# Altium PCB for_BLDC_fan.PcbDoc
Units mm, origin at the board's own origin, x right, y up, seen from the top; angles counter-clockwise.
Board outline 166.45 x 52.15 mm, 2 copper layers (Top Layer, Bottom Layer); 25 components, 37 nets, 115 pads, 23 vias.
Unrouted connection lines stored in the file: 1.
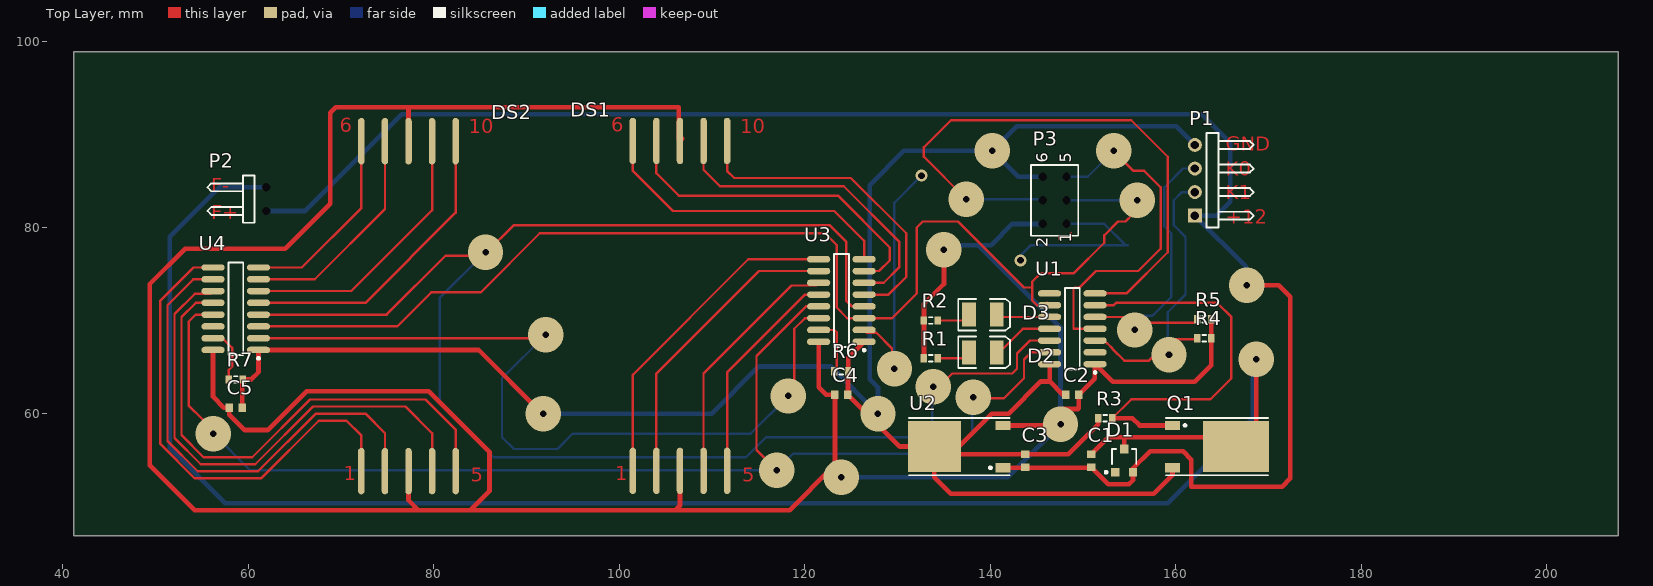
[diagram p0: Top Layer view]
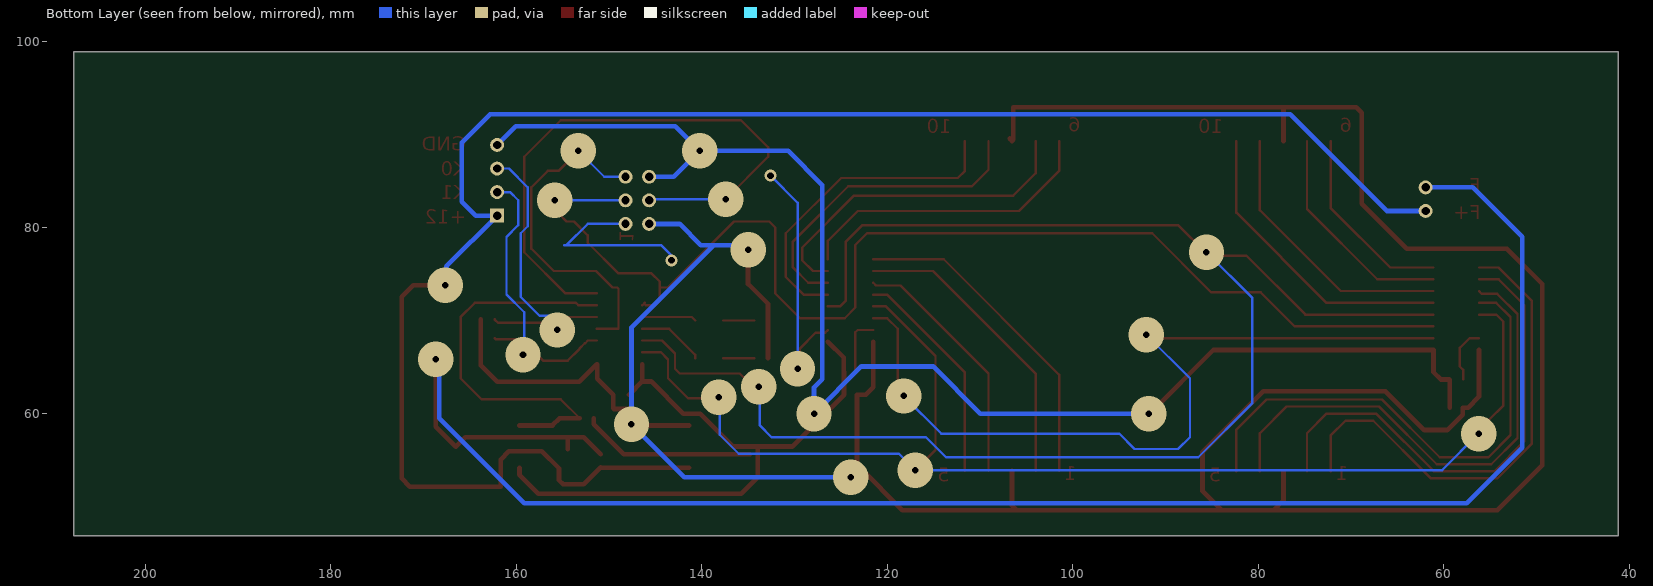
[diagram p1: Bottom Layer view, seen from below]

## Layer stack, top to bottom
Top Layer: signal copper 0.0356
Dielectric: dielectric 0.32, FR-4, Dk 4.8
Bottom Layer: signal copper 0.0356

## Board outline
41.224,98.933 41.224,46.787 207.67,46.787 207.67,98.933

## Design rules (kind name [scope] priority, off if disabled: settings)
Clearance [All] p1: gap=0.508
PolygonConnect [All] p1: connectstyle=Relief reliefconductorwidth=0.254 reliefentries=4 polygonreliefangle="90 Angle"
RoomDefinition "U_Индикатор с драйвером1" [InComponentClass('U_Индикатор с драйвером1')] p1: confinementstyle=ConfineIn formatcopy=TRUE lockcomponents=FALSE outline 91.821,46.787 137.287,46.787 137.287,97.663 91.821,97.663
RoomDefinition for_BLDC_fan [InComponentClass('for_BLDC_fan')] p2: confinementstyle=ConfineIn formatcopy=TRUE lockcomponents=FALSE outline 41.224,46.787 207.67,46.787 207.67,98.933 41.224,98.933
RoomDefinition "U_Индикатор с драйвером2" [InComponentClass('U_Индикатор с драйвером2')] p3: confinementstyle=ConfineIn formatcopy=TRUE lockcomponents=FALSE outline 41.224,46.787 91.821,46.787 91.821,97.993 41.224,97.993
RoutingVias [All] p1: holewidth=0.711 width=3.81 viastyle="Through Hole" minholewidth=0.711 minwidth=0.508 maxholewidth=0.711 maxwidth=5.08
SilkscreenOverComponentPads [All] p1 off: minsilkscreentomaskgap=0.2
SolderMaskExpansion [All] p1: expansion=0.102
Width [(InNet('5В') OR InNet('GND') OR InNet('12B') OR InNet('NetC1_1'))] p1: maxlimit=1.016 minlimit=0.508 preferedwidth=0.762
Width Width_1 [All] p2: maxlimit=0.508 minlimit=0.254 preferedwidth=0.254
27 further rules are at their usual default settings.

## Classes and differential pairs
component class "U_Индикатор с драйвером2": C5 DS2 R7 U4
component class "U_Индикатор с драйвером1": C4 DS1 R6 U3
channel class "Индикатор с драйвером": "U_Индикатор с драйвером1" "U_Индикатор с драйвером2"
component class for_BLDC_fan: C1 C2 C3 D1 D2 D3 J11 P1 P2 P3 P?1 Q1 R1 R2 R3 R4 R5 U1 U2

## Components (designator, comment, footprint, x,y, rotation, side; value= is the part's Value field where it differs from the comment)
C1 "Cap Semi" CAPC1608L 150.876,54.864 r270 top
C2 "Cap Semi" CAPC1608L 148.844,61.976 r0 top
C3 "Cap Semi" CAPC1608L 143.764,54.864 r270 top
C4 "Cap Semi" CAPC1608L 123.952,61.976 r180 top
C5 "Cap Semi" CAPC1608L 58.674,60.579 r180 top (schematic designator C4)
D1 "BAV99" SOT-23 154.432,54.864 r0 top (schematic designator D2)
D2 "LED3" DSO-C2/D5.6 139.192,66.548 r0 top (schematic designator D1)
D3 "LED3" DSO-C2/D5.6 139.192,70.612 r0 top
DS1 "SA10" SA10-21_SMD 118.618,89.332 r270 top
DS2 "SA10" SA10-21_SMD 89.357,89.306 r270 top (schematic designator DS1)
P1 "Header 4H" HDR1X4H 162.052,81.28 r90 top
P2 "Header 2H" HDR1X2H 61.976,84.328 r270 top
P3 "Header 3X2" HDR2X3 148.209,80.391 r90 top
Q1 "IRFR024" TO-252AA 163.068,56.388 r270 top
R1 "Res3" RESC1608L 133.604,65.913 r0 top
R2 "Res3" RESC1608L 133.604,69.977 r0 top
R3 "Res3" RESC1608L 152.4,59.436 r0 top
R4 "Res3" RESC1608L 163.068,68.072 r0 top
R5 "Res3" RESC1608L 163.068,70.104 r0 top
R6 "Res3" RESC1608L 123.952,64.516 r180 top
R7 "Res3" RESC1608L 58.674,63.627 r180 top (schematic designator R6)
U1 "ATtiny24" SOIC14_M 148.844,69.088 r180 top
U2 "MC78M05BDTRK" 369A-13 137.668,56.388 r90 top
U3 "MBI5168" SO-16_M 123.952,72.136 r180 top
U4 "MBI5168" SO-16_M 58.674,71.247 r180 top (schematic designator U3)

## Footprints (in the part's own frame and the unit in brackets; to place one, negate y for a bottom-side part, rotate by r counter-clockwise, add the part's x,y. Pads: shape width x height; smd on the part's side, far side on the other; paste and mask are expansions set on the pad)
369A-13 [mm] "D-PAK/TO-252-AA; 3 Leads (1 Cropped); Body 10.3 (inc. leads) x 6.7 mm (LxW max)"
  rect 1x1.6 smd: 1(-2.285,-3.7) 3(2.285,-3.7)
  rect 5.5x5.7 smd: 4(0,3.7)
  silkscreen extent -3.09,-4.4 3.09,6.45
CAPC1608L [mm] "Chip Capacitor, Body 1.6x0.8mm, IPC High Density"
  rect 0.8x0.9 smd: 1(-0.7,0) 2(0.7,0)
  body extent -0.87,-0.48 0.87,0.48, height 1.3
DSO-C2/D5.6 [mm] "SM LED; 2 C-Bend Leads; Body 3.5 x 2.8 x 1.9 mm, inc leads (LxWxH typ)"
  rect 1.5x2.6 smd: 1(-1.5,0) 2(1.5,0)
  silkscreen extent -2.65,-1.7 2.95,1.7
HDR1X2H [mm] "Connector; Header; 2 Position; Right Angle"
  round 0 / inner round 0 / far side round 1.5 hole 0.9: 1(0,0) 2(2.54,0)
  silkscreen extent -1.27,-6.35 3.81,-1.27
HDR1X4H [mm] "Connector; Header; 4 Position; Right Angle"
  rect 1.5x1.5 hole 0.9: 1(0,0)
  round 1.5 hole 0.9: 2(2.54,0) 3(5.08,0) 4(7.62,0)
  silkscreen extent -1.27,-6.35 8.89,-1.27
HDR2X3 [mm] "Connector; Header; 3x2 Position"
  round 0 / inner round 0 / far side round 1.5 hole 0.9: 1(0,0) 2(0,2.54) 3(2.54,0) 4(2.54,2.54) 5(5.08,0) 6(5.08,2.54)
  silkscreen extent -1.27,-1.27 6.35,3.81
RESC1608L [mm] "Chip Resistor, Body 1.6x0.8mm, IPC High Density"
  rect 0.7x0.9 smd: 1(-0.75,0) 2(0.75,0)
  silkscreen extent -0.2,-0.35 0.2,0.35, body extent -0.85,-0.48 0.85,0.48, height 0.9
SA10-21_SMD [mm] "для SA10-21GWA с отогнутыми ножками"
  oval 5x0.7 smd: 1(35.56,-17.145) 2(35.56,-14.605) 3(35.56,-12.065) 4(35.56,-9.525) 5(35.56,-6.985) 6(0,-17.145) 7(0,-14.605) 8(0,-12.065) 9(0,-9.525) 10(0,-6.985)
  body extent 0,-24 34,0, height 11
SO-16_M [mm] "16-Pin Small Outline Integrated Circuit 1.27 mm Pitch, IPC Low Density"
  oval 2.5x0.7 smd: 1(-2.45,4.445) 2(-2.45,3.175) 3(-2.45,1.905) 4(-2.45,0.635) 5(-2.45,-0.635) 6(-2.45,-1.905) 7(-2.45,-3.175) 8(-2.45,-4.445) 9(2.45,-4.445) 10(2.45,-3.175) 11(2.45,-1.905) 12(2.45,-0.635) 13(2.45,0.635) 14(2.45,1.905) 15(2.45,3.175) 16(2.45,4.445)
  silkscreen extent -2.58,-5 0.8,5.47, body extent -2,-5 2,5, height 1.75
SOIC14_M [mm] "14-Pin Small Outline Integrated Circuit 1.27 mm Pitch, IPC Low Density"
  oval 2.5x0.7 smd: 1(-2.45,3.81) 2(-2.45,2.54) 3(-2.45,1.27) 4(-2.45,0) 5(-2.45,-1.27) 6(-2.45,-2.54) 7(-2.45,-3.81) 8(2.45,-3.81) 9(2.45,-2.54) 10(2.45,-1.27) 11(2.45,0) 12(2.45,1.27) 13(2.45,2.54) 14(2.45,3.81)
  silkscreen extent -2.58,-4.4 0.8,4.83, body extent -2,-4.38 2,4.38, height 1.75
SOT-23 [mm] "SOT-23; 3 Leads; Body 3.0 x 2.6 mm, inc. leads (LxW max)"
  rect 0.9x0.95 smd: 1(-0.95,-1.25) 2(0.95,-1.25) 3(0,1.25)
  silkscreen extent -2.07,-1.37 1.3,1.25
TO-252AA [mm] "D-PAK/TO-252-AA; 3 Leads (1 Cropped); Body 10.4 (inc. leads) x 6.7 mm (LxW max)"
  rect 1x1.6 smd: 1(-2.285,-3.425) 3(2.285,-3.425)
  rect 5.5x7.1 smd: 4(0,3.425)
  silkscreen extent -3.09,-4.13 3.09,6.88

## Part data
C1 C2 C3 C4 C5: "Capacitor (Semiconductor SIM Model)"
D1: "Silicon Switching Diode Array for High-Speed Switching"
D2 D3: "Typical BLUE SiC LED"
DS1 DS2: library part SA10-21GWA, "KingBright, SA10-21GWA"
P1: "Header, 4-Pin, Right Angle"
P2: "Header, 2-Pin, Right Angle"
P3: "Header, 3-Pin, Dual row"
Q1: "HEXFET N-Channel Power MOSFET"
R1 R2 R3 R4 R5 R6 R7: "Resistor"
U1: "8-Bit AVR Microcontroller with 1K Byte of Flash Memory"
U2: "Three-Terminal Medium Current Positive Voltage Regulator"
U3 U4: "Macroblock, 8-bit Constant Current LED Sink Driver"

## Via types
v1: diameter 3.81, hole 0.711, Top Layer to Bottom Layer, 21 vias
v2: diameter 1.27, hole 0.711, Top Layer to Bottom Layer, 2 vias

## Nets (pads, with @x,y where several pads share a name; then routed paths per layer and width w, separated by ;. In a path a pad name is that pad's centre, name@x,y a point inside that pad or via, vN(x,y) a via of type N, cw(c..) or ccw(c..) an arc to the next point about the centre after c; other vN are vias at no path point)
5В: C2.2 C4.2 C5.2 DS1.3 DS1.8 DS2.3 DS2.8 P3.2 R1.1 R2.1 R4.2 R5.2 U1.1 U2.3 U3.16 U4.16 | length 356.1
  Top Layer w0.508: U4.16 56.224,61.759 57.404,60.579 C5.2 57.974,59.844 59.652,58.166 62.116,58.166 66.307,62.357 79.489,62.357 86.014,55.832 86.014,51.597 83.947,49.53 ; DS2.3 77.292,50.597 78.359,49.53 ; DS2.8 77.292,92.913 ; DS1.3 106.553,50.038 106.045,49.53 ; DS1.8@106.807,89.586 DS1.8 106.426,89.459 106.426,92.964 69.456,92.964 68.866,92.375 68.866,82.582 64.008,77.724 53.213,77.724 49.403,73.914 49.403,54.356 54.229,49.53 78.359,49.53 ; U3.16 121.502,62.775 122.301,61.976 C4.2 123.252,54.418 122.936,54.102 118.364,49.53 106.045,49.53 ; R1.1 R2.1 132.854,71.767 135.001,73.914 v1(135.001,77.597) ; v1@134.239,77.089 134.874,77.724 v1@135.255,78.105 ; U2.3 145.795,58.673 146.749,59.627 147.574,60.452 149.479,60.452 149.544,60.517 C2.2 151.257,63.689 151.257,65.241 U1.1 153.199,63.373 162.052,63.373 163.818,65.139 R4.2 R5.2 ; 78.359,49.53 83.947,49.53 ; 83.947,49.53 106.045,49.53
  Bottom Layer w0.508: v1(123.952,53.086) 141.859,53.086 v1(147.574,58.801) 147.574,69.215 138.684,78.105 ; v1(135.001,77.597) 135.001,77.851 135.255,78.105 138.684,78.105 ; P3.2 142.367,80.391 140.081,78.105 138.684,78.105
12B: C1.2 C3.2 D1.2 P1.1 P2.2 U2.1 | length 192.8
  Top Layer w0.508: U2.1 143.764,54.103 150.815,54.103 C1.2 ; C1.2@151.126,53.914 C1.2 ; v1(167.64,73.787) 171.069,73.787 172.339,72.517 172.339,52.959 171.45,52.07 161.671,52.07 161.671,54.991 160.782,55.88 157.226,55.88 155.382,54.036 D1.2 155.382,52.766 154.94,52.324 152.716,52.324 C1.2
  Bottom Layer w0.508: P2.2 66.167,81.788 76.581,92.202 162.814,92.202 165.862,89.154 165.862,82.804 164.338,81.28 P1.1 167.513,75.819 v1@167.513,73.787
GND: C2.1 C3.1 C4.1 C5.1 P1.4 P3.6 Q1.3 R3.1 R6.1 R7.1 U1.14 U2.4 U3.1 U4.1 | length 238.8
  Top Layer w0.508: C5.1 59.374,63.577 R7.1 60.325,63.627 61.124,64.426 U4.1 84.836,66.802 v1@91.757,59.88 ; R6.1@124.652,64.466 C4.1 127.286,59.341 130.24,56.388 U2.4 ; R6.1 124.702,65.991 U3.1 ; U2.4@134.792,55.564 C3.1 148.401,55.564 151.65,58.813 R3.1 ; U1.14 146.394,63.41 ; C2.1@147.828,61.976 146.394,63.41 ; Q1.3 159.643,53.344 157.607,51.308 135.763,51.308 133.968,53.103 U2.4 ; U2.4 136.614,56.388 140.161,59.935 141.977,59.935 145.452,63.41 146.394,63.41
  Bottom Layer w0.508: v1(91.821,59.944) 109.982,59.944 115.062,65.024 122.809,65.024 v1(127.889,59.944) 127.889,62.776 127,63.665 127,84.582 130.683,88.265 v1(140.208,88.265) ; P3.6 143.002,85.471 v1(140.208,88.265) ; P1.4 160.02,90.932 142.875,90.932 v1(140.208,88.265)
KEY0: P1.3 R5.1 U1.5 | length 35
  Top Layer w0.254: U1.5 v1@155.575,70.358 ; v1@155.575,68.834 v1(155.575,68.961) v1@155.575,70.358 ; v1@155.575,70.485 v1@155.575,70.358 ; v1@156.222,70.104 155.968,70.358 v1@155.575,70.358 ; v1@156.845,69.723 161.937,69.723 R5.1
  Bottom Layer w0.254: v1@155.575,68.834 v1(155.575,68.961) 155.575,70.485 157.48,70.485 159.512,72.517 159.512,79.375 158.75,80.137 158.75,84.328 160.782,86.36 P1.3
KEY1: P1.2 R4.1 U1.3 | length 35.2
  Top Layer w0.254: U1.3 152.273,67.818 152.558,67.533 152.602,67.533 153.179,66.956 153.179,66.912 154.432,65.659 157.099,65.659 158.496,67.056 159.258,67.818 v1(159.258,66.294) ; v1@159.131,67.945 159.258,67.945 162.191,67.945 R4.1
  Bottom Layer w0.254: v1(159.258,66.294) 159.258,67.818 159.131,67.945 159.131,70.866 161.036,72.771 161.036,78.994 159.766,80.264 159.766,82.931 160.655,83.82 P1.2
LE: U1.12 U3.4 U4.4 | length 174.3
  Top Layer w0.254: U4.4 74.93,70.612 81.28,76.962 85.344,76.962 85.661,77.279 88.646,80.264 122.682,80.264 124.46,78.486 124.46,72.136 125.095,71.501 U3.4 ; v1(133.858,62.854) 133.858,62.992 133.477,62.992 133.477,62.854 133.477,62.357 133.731,62.103 134.17,62.542 135.89,64.262 142.367,64.262 142.875,64.77 142.875,66.421 144.272,67.818 U1.12
  Bottom Layer w0.254: v1(85.598,77.343) 80.645,72.39 80.645,61.087 86.487,55.245 113.665,55.245 115.824,57.404 132.461,57.404 133.731,58.674 133.731,62.103 133.477,62.357 133.477,62.854 133.477,62.992 133.858,62.992 v1(133.858,62.854)
MISO: P3.1 U3.2 | length 48.2
  Top Layer w0.254: U3.2 126.687,68.676 127.71,68.676 129.413,66.973 v1@129.413,64.897
  Bottom Layer w0.254: v1(129.667,64.77) 129.667,82.677 v2(132.588,85.598) ; v2@142.875,76.454 142.875,76.581 143.002,76.708 144.399,78.105 145.161,78.105 ; 144.907,78.105 145.161,78.105 ; P3.1 152.273,80.391 154.559,78.105 ; 154.813,78.105 154.559,78.105 ; 145.161,78.105 154.559,78.105
  other v2: 143.256,76.454
MOSI: P3.4 U1.7 | length 64.9
  Top Layer w0.254: v1(137.414,83.058) 132.842,87.63 132.842,88.646 135.763,91.567 155.194,91.567 159.131,87.63 159.131,77.343 154.686,72.898 U1.7
  Bottom Layer w0.254: v1(137.414,83.058) 145.542,83.058 P3.4
NetC1_1: C1.1 D1.3 P2.1 Q1.4 | length 193.3
  Top Layer w0.508: C1.1 152.716,57.404 154.432,57.404 ; D1.3 154.432,57.404 ; v1(168.656,65.786) 168.656,58.551 Q1.4 165.477,57.404 154.432,57.404
  Bottom Layer w0.508: P2.1 56.896,84.328 51.562,78.994 51.562,56.261 57.531,50.292 159.131,50.292 168.275,59.436 168.275,65.786 v1@168.275,66.04
NetD2_1: D2.1 R1.2 | length 3.3
  Top Layer w0.254: R1.2 D2.1@137.692,65.913
NetD2_2: D2.2 U1.11 | length 7.2
  Top Layer w0.254: D2.2@140.692,65.913 140.692,66.27 143.51,69.088 U1.11
NetD3_1: D3.1 R2.2 | length 3.3
  Top Layer w0.254: R2.2 D3.1@137.692,69.977
NetD3_2: D3.2 U1.10 | length 5.9
  Top Layer w0.254: D3.2@140.692,69.977 141.073,70.358 U1.10
NetDS1_1: DS1.1 U3.9 | length 35.5
  Top Layer w0.254: DS1.1 101.473,64.135 113.919,76.581 U3.9
NetDS1_2: DS1.2 U3.10 | length 32.6
  Top Layer w0.254: DS1.2 104.013,64.262 115.062,75.311 U3.10
NetDS1_4: DS1.4 U3.11 | length 26.9
  Top Layer w0.254: DS1.4 109.093,64.262 118.587,73.756 121.217,73.756 U3.11
NetDS1_5: DS1.5 U3.12 | length 24
  Top Layer w0.254: DS1.5 111.633,64.389 120.015,72.771 U3.12
NetDS1_6: DS1.6 U3.8 | length 33.3
  Top Layer w0.254: DS1.6 101.473,86.106 105.791,81.788 123.19,81.788 126.402,78.576 U3.8
NetDS1_7: DS1.7 U3.7 | length 36.6
  Top Layer w0.254: DS1.7 104.013,85.852 106.426,83.439 123.571,83.439 129.159,77.851 129.159,76.454 128.016,75.311 U3.7
NetDS1_9: DS1.9 U3.6 | length 34.6
  Top Layer w0.254: DS1.9 109.093,86.233 110.871,84.455 124.206,84.455 130.175,78.486 130.175,75.692 128.524,74.041 U3.6
NetDS1_10: DS1.10 U3.5 | length 35.3
  Top Layer w0.254: DS1.10 111.633,86.106 112.395,85.344 124.968,85.344 130.937,79.375 130.937,74.676 129.032,72.771 U3.5
NetDS2_1: DS2.1 U4.9 | length 52.9
  Top Layer w0.254: U4.9 54.102,75.692 50.546,72.136 50.546,56.675 54.262,52.959 61.399,52.959 67.622,59.182 70.612,59.182 72.212,57.582 DS2.1
NetDS2_2: DS2.2 U4.10 | length 53
  Top Layer w0.254: U4.10 54.102,74.422 51.308,71.628 51.308,56.991 54.578,53.721 61.083,53.721 67.306,59.944 72.644,59.944 74.752,57.836 DS2.2
NetDS2_4: DS2.4 U4.11 | length 55.3
  Top Layer w0.254: U4.11 55.939,72.867 54.263,72.867 52.07,70.674 52.07,57.306 54.893,54.483 60.768,54.483 66.991,60.706 76.962,60.706 79.832,57.836 DS2.4
NetDS2_5: DS2.5 U4.12 | length 55.7
  Top Layer w0.254: U4.12 54.356,71.882 52.832,70.358 52.832,57.622 55.209,55.245 60.452,55.245 66.675,61.468 79.121,61.468 82.372,58.217 DS2.5
NetDS2_6: DS2.6 U4.8 | length 20.9
  Top Layer w0.254: U4.8 65.786,75.692 72.212,82.118 DS2.6
NetDS2_7: DS2.7 U4.7 | length 24.1
  Top Layer w0.254: U4.7 67.183,74.422 74.752,81.991 DS2.7
NetDS2_9: DS2.9 U4.6 | length 29.8
  Top Layer w0.254: U4.6 71.12,73.152 79.832,81.864 DS2.9
NetDS2_10: DS2.10 U4.5 | length 33
  Top Layer w0.254: U4.5 72.644,71.882 82.372,81.61 DS2.10
NetQ1_1: Q1.1 R3.2 U1.6 | length 43.5
  Top Layer w0.254: U1.6 153.289,71.628 153.543,71.882 164.465,71.882 165.989,70.358 165.989,63.754 163.715,61.48 155.194,61.48 R3.2
  Top Layer w0.508: R3.2 155.321,59.436 156.084,58.673 Q1.1
NetR6_2: R6.2 U3.15 | length 6.3
  Top Layer w0.254: U3.15 123.19,68.961 123.444,68.707 123.444,64.758 R6.2
NetR7_2: R7.2 U4.15 | length 6.1
  Top Layer w0.254: U4.15 57.247,68.072 58.293,67.026 58.293,65.024 57.924,64.655 R7.2
NetU3_14: U3.14 U4.2 | length 87.5
  Top Layer w0.254: U4.2 v1@91.567,68.072 ; v1@118.872,61.849 118.872,69.088 120.015,70.231 U3.14
  Bottom Layer w0.254: v1(92.075,68.453) 87.376,63.754 87.376,57.404 88.646,56.134 93.345,56.134 94.996,57.785 114.173,57.785 v1(118.237,61.849)
NetU4_14: U4.14
OE: U1.13 U3.13 U4.13 | length 142.3
  Top Layer w0.254: U4.13 54.356,70.612 53.594,69.85 53.594,60.833 55.118,59.309 56.261,59.309 v1(56.261,57.785) ; v1(116.967,53.848) 114.808,56.007 114.808,66.167 120.142,71.501 U3.13 ; v1(138.176,61.722) 138.176,62.865 137.922,62.865 137.922,61.849 138.112,61.658 138.176,61.595 141.478,61.595 143.637,63.754 143.637,65.786 144.399,66.548 U1.13
  Bottom Layer w0.254: v1(56.261,57.785) 60.198,53.848 v1(116.967,53.848) 118.745,55.626 136.017,55.626 138.049,57.658 138.049,61.722 v1@138.049,61.849
RESET: P3.5 U1.4 | length 37.4
  Top Layer w0.254: U1.4 148.971,69.088 148.971,73.406 149.098,73.533 149.602,73.533 151.38,75.311 155.956,75.311 158.369,77.724 158.369,84.328 156.591,86.106 155.448,86.106 v1(153.289,88.265)
  Bottom Layer w0.254: P3.5 150.495,85.471 v1(153.289,88.265)
SCK: P3.3 U1.9 U3.3 U4.3 | length 132.8
  Top Layer w0.254: U4.3 76.073,69.342 79.756,73.025 85.09,73.025 91.44,79.375 122.174,79.375 123.444,78.105 123.444,71.374 124.587,70.231 U3.3 129.413,70.231 132.08,72.898 132.08,80.01 132.715,80.645 136.525,80.645 143.637,73.533 144.509,73.533 ; U1.9@146.05,71.628 145.034,71.628 144.509,72.153 144.509,73.533 ; U1.9@146.109,71.913 U1.9 ; v1@155.349,81.435 154.559,80.645 153.761,80.645 152.273,79.157 152.273,78.359 148.971,75.057 145.415,75.057 144.509,74.151 144.509,73.533
  Bottom Layer w0.254: P3.3 v1(155.829,82.931)
pads on no net: D1.1 U1.2 U1.8

## Other copper
Top Layer:
  text "GND" at 165.354,88.265 h1.52
  text "K0" at 165.354,85.598 h1.52
  text "F-" at 56.007,83.82 h1.52
  text "K1" at 165.354,83.058 h1.52
  text "F+" at 56.007,80.899 h1.52
  text "+12" at 165.354,80.391 h1.52
  text "1" at 148.844,78.359 h1.52 r90

## Text inside footprints (layer, text, board x,y; h text height)
DS1: Top Layer "10" at 113.043,90.182 h1.52; Top Layer "6" at 99.143,90.307 h1.52; Top Layer "5" at 113.243,52.607 h1.52; Top Layer "1" at 99.593,52.782 h1.52
DS2: Top Layer "10" at 83.782,90.156 h1.52; Top Layer "6" at 69.882,90.281 h1.52; Top Layer "5" at 83.982,52.581 h1.52; Top Layer "1" at 70.332,52.756 h1.52
P3: Top Overlay "1" at 148.717,78.359 h1.27 r90; Top Overlay "2" at 146.177,77.851 h1.27 r90; Top Overlay "5" at 148.717,86.995 h1.27 r90; Top Overlay "6" at 146.177,86.995 h1.27 r90